# EAGLE board E4m (EAGLE 7.6.0)
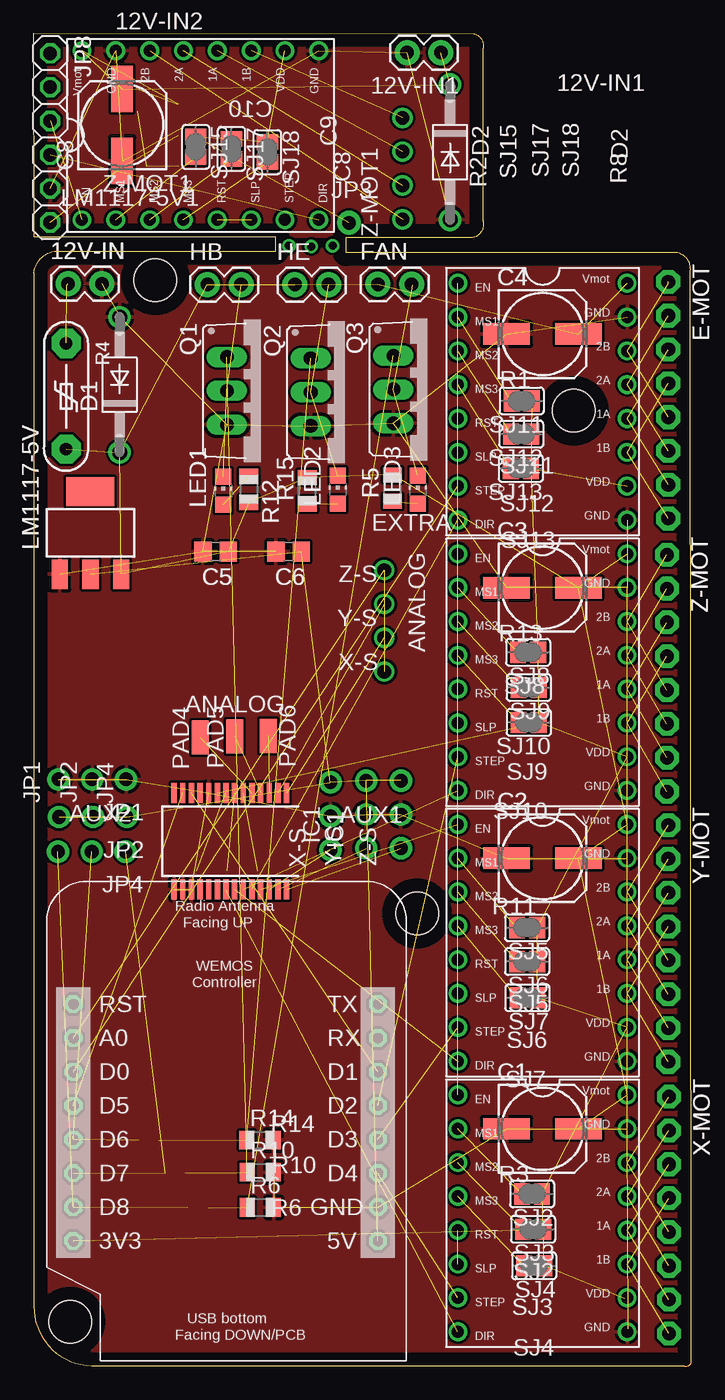
[diagram p0: board, top side]
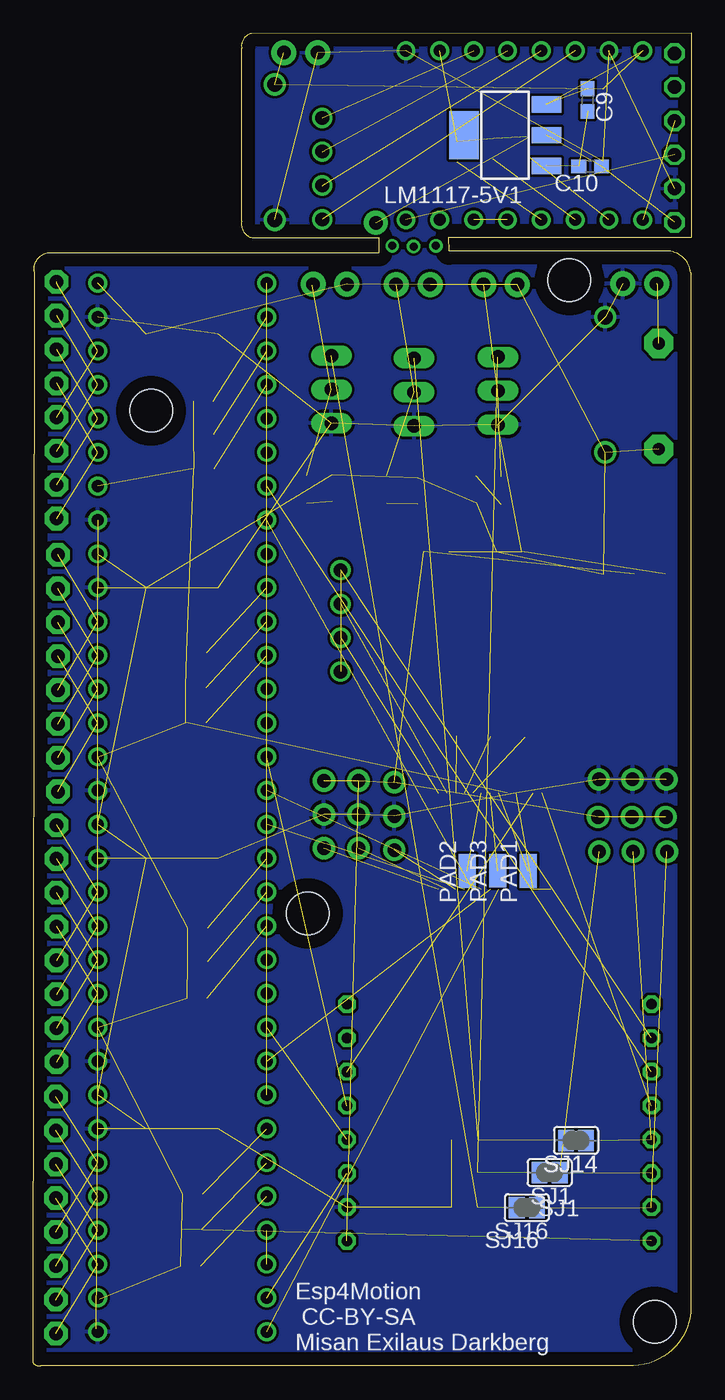
[diagram p1: board, bottom side, seen from below]

Size 49.41 x 100.11 mm. Coordinates in mm from the lower left corner, seen from the top.
Outline: 0,100.11 0.03,84.78 18.22,84.8 18.19,83.74 2.07,83.74 arc90 0.05,82.12 0.05,4.52 arc90 4.37,0.05 48.77,0.05 arc90 49.41,0.26 49.31,82.16 arc90 48.37,83.61 23.47,83.61 23.47,84.75 32.98,84.75 arc90 33.77,85.98 33.77,98.98 arc90 33.05,100.08 0.02,100.1
Copper layers (1*16): Top 0.035mm / dielectric 1.5mm / Bottom 0.035mm
Design rules "default *": minimum track width 10mil, minimum drill 24mil, track to track 8mil, track to pad 8mil, pad to pad 8mil, via to via 8mil, smd to smd 8mil, copper to edge 40mil, drill to drill 8mil, minimum pad ring 10mil, minimum via ring 8mil, stop-mask expansion 4mil, vias tented up to drill 0mil, thermal gap 10mil
Net classes: 1 Power: width 0.8 mm; 2 line: width 0.4 mm; 3 aux: width 0.2 mm
Holes 3.2 mm at 2.77,3.35 9.17,81.55 28.82,34 40.57,71.75

## Footprints (pad centres in the part's own frame; a part is rotated, then mirrored left to right if it is on the bottom)
1X02 = drill 1.016 pad 1.88: 1 0,0; 2 2.54,0
1X04 = drill 1.016: 1 -2.54,0; 2 0,0; 3 2.54,0; 4 5.08,0
153CLV-0605 = smd 3.5 x 1.6: + 2.7,0; - -2.7,0
C0805 = smd 1.3 x 1.5: 1 -0.95,0; 2 0.95,0
C0603 = smd 1.1 x 1: 1 -0.85,0; 2 0.85,0
DO41-10 = drill 1.118: A 5.08,0; C -5.08,0
1X08-CLEANBIG = drill 1.016 pad 1.778 octagon: 1 -8.89,0; 2 -6.35,0; 3 -3.81,0; 4 -1.27,0; 5 1.27,0; 6 3.81,0; 7 6.35,0; 8 8.89,0
SSOP28 = smd 0.4 x 1.5: 1 -4.225,-3.625; 2 -3.575,-3.625; 3 -2.925,-3.625; 4 -2.275,-3.625; 5 -1.625,-3.625; 6 -0.975,-3.625; 7 -0.325,-3.625; 8 0.325,-3.625; 9 0.975,-3.625; 10 1.625,-3.625; 11 2.275,-3.625; 12 2.925,-3.625; 13 3.575,-3.625; 14 4.225,-3.625; 15 4.225,3.625; 16 3.575,3.625; 17 2.925,3.625; 18 2.275,3.625; 19 1.625,3.625; 20 0.975,3.625; 21 0.325,3.625; 22 -0.325,3.625; 23 -0.975,3.625; 24 -1.625,3.625; 25 -2.275,3.625; 26 -2.925,3.625; 27 -3.575,3.625; 28 -4.225,3.625
1X03-CLEANBIG = drill 1.016 pad 1.676: 1 -2.54,0; 2 0,0; 3 2.54,0
1X01-CLEANBIG = drill 1.016 pad 1.778: 1 0,0
1X06 = drill 1.016 octagon: 1 -6.35,0; 2 -3.81,0; 3 -1.27,0; 4 1.27,0; 5 3.81,0; 6 6.35,0
CHIP-LED0805 = smd 1.2 x 1.2: A 0,-1.05; C 0,1.05
SOT223 = smd 1.219 x 2.235: 1 -2.311,-3.099; 2 0,-3.099; 3 2.311,-3.099 | smd 3.6 x 2.2: TAB 0,3.099
SMD1,27-2,54 = smd 1.27 x 2.54: 1 0,0
TO220BV = drill 1.016 long: D 0,-2.54; G -2.54,-2.54; S 2.54,-2.54
PF-8.0 = drill 0.914 pad 2.184 octagon: 1 -3.969,0; 2 3.969,0
R0805 = smd 1.1 x 1.4: 1 -1,0; 2 1,0
SJ = smd 1.168 x 1.6: 1 -0.762,0; 2 0.762,0
A4988BREAKOUT = drill 0.9: 1A 8.89,1.27; 1B 11.43,1.27; 2A 6.35,1.27; 2B 3.81,1.27; DIR 16.51,-11.43; EN -1.27,-11.43; GND 16.51,1.27; GND@0 1.27,1.27; MS1 1.27,-11.43; MS2 3.81,-11.43; MS3 6.35,-11.43; RST 8.89,-11.43; SLP 11.43,-11.43; STEP 13.97,-11.43; VDD 13.97,1.27; VMOT -1.27,1.27
WEMOS = drill 0.8 octagon: 3V3 0,0; 5V 22.86,0; A0 0,15.24; D0 0,12.7; D1 22.86,12.7; D2 22.86,10.16; D3 22.86,7.62; D4 22.86,5.08; D5 0,10.16; D6 0,7.62; D7 0,5.08; D8 0,2.54; GND 22.86,2.54; RST 0,17.78; RX 22.86,15.24; TX 22.86,17.78

## Placement (x,y rotation side)
12V-IN  [1X02]  2.61,81.29 0 top
12V-IN1  [1X02]  30.6,98.65 180 top
ANALOG  [1X04]  26.35,57.25 270 top
C1  100uf  [153CLV-0605]  38.23,17.83 0 top
C2  100uf  [153CLV-0605]  38.23,38.15 0 top
C3  100uf  [153CLV-0605]  38.23,58.47 0 top
C4  100uf  [153CLV-0605]  38.23,77.52 0 top
C5  10uf  [C0805]  13.69,61.18 180 top
C6  100uf  [C0805]  19.17,61.18 180 top
C8  100uf  [153CLV-0605]  6.67,93.21 90 top
C9  10uf  [C0603]  7.8,95.09 270 bottom
C10  100uf  [C0603]  7.62,90.11 180 bottom
D1  1N4004  [DO41-10]  6.48,73.71 90 top
D2  1N4004  [DO41-10]  31.29,91.18 270 top
E-MOT  [1X08-CLEANBIG]  47.67,72.55 270 top
FAN  [1X02]  25.87,81.25 0 top
HB  [1X02]  13.07,81.23 0 top
HE  [1X02]  19.63,81.23 0 top
IC1  MCP23017SS  [SSOP28]  14.79,39.43 180 top
JP1  [1X03-CLEANBIG]  4.42,44.07 180 top
JP2  [1X03-CLEANBIG]  4.47,41.25 180 top
JP3  [1X01-CLEANBIG]  23.7,85.88 0 top
JP4  [1X03-CLEANBIG]  4.39,38.65 180 top
JP8  [1X06]  1.27,92.25 270 top
LED1  [CHIP-LED0805]  14.27,65.75 0 top
LED2  [CHIP-LED0805]  22.87,65.85 0 top
LED3  [CHIP-LED0805]  28.87,65.85 0 top
LM1117-5V  LM1117IMPX-ADJ  [SOT223]  4.29,62.58 0 top
LM1117-5V1  LM1117IMPX-ADJ  [SOT223]  13.99,92.45 90 bottom
PAD1  WIREPADSMD1,27-254  [SMD1,27-2,54]  12.27,37.19 0 bottom
PAD2  WIREPADSMD1,27-254  [SMD1,27-2,54]  16.84,37.19 0 bottom
PAD3  WIREPADSMD1,27-254  [SMD1,27-2,54]  14.55,37.21 0 bottom
PAD4  WIREPADSMD1,27-254  [SMD1,27-2,54]  12.52,47.22 0 top
PAD5  WIREPADSMD1,27-254  [SMD1,27-2,54]  15.11,47.3 0 top
PAD6  WIREPADSMD1,27-254  [SMD1,27-2,54]  17.65,47.32 180 top
Q1  IRL540  [TO220BV]  17.07,73.25 270 top
Q2  IRL540  [TO220BV]  23.37,73.15 270 top
Q3  IRL540  [TO220BV]  29.57,73.35 270 top
R4  11  [PF-8.0]  2.46,72.85 270 top
R5  22R  [R0805]  26.97,65.95 90 top
R6  10k  [R0805]  17.05,11.93 0 top
R10  10k  [R0805]  17.04,14.57 0 top
R12  22R  [R0805]  16.17,65.85 270 top
R14  10k  [R0805]  17.02,16.98 0 top
R15  22R  [R0805]  20.57,65.75 90 top
SJ1  [SJ]  10.65,14.54 180 bottom
SJ2  [SJ]  37.44,12.94 180 top
SJ3  [SJ]  37.52,10.29 180 top
SJ4  [SJ]  37.6,7.54 180 top
SJ5  [SJ]  37.07,32.93 180 top
SJ6  [SJ]  37.07,30.39 180 top
SJ7  [SJ]  37.1,27.66 180 top
SJ8  [SJ]  37.15,53.62 180 top
SJ9  [SJ]  37.2,50.97 180 top
SJ10  [SJ]  37.2,48.35 180 top
SJ11  [SJ]  36.66,72.49 180 top
SJ12  [SJ]  36.63,70 180 top
SJ13  [SJ]  36.6,67.43 180 top
SJ14  [SJ]  8.67,16.95 180 bottom
SJ15  [SJ]  12.2,91.58 270 top
SJ16  [SJ]  12.36,11.91 180 bottom
SJ17  [SJ]  14.87,91.42 270 top
SJ18  [SJ]  17.58,91.19 270 top
U$1  A4988BREAKOUT  [A4988BREAKOUT]  43.31,19.1 270 top
U$2  A4988BREAKOUT  [A4988BREAKOUT]  43.31,80.06 270 top
U$3  A4988BREAKOUT  [A4988BREAKOUT]  43.31,39.42 270 top
U$5  WEMOS  [WEMOS]  3.01,9.41 0 top
U$6  A4988BREAKOUT  [A4988BREAKOUT]  4.92,97.52 0 top
U$9  A4988BREAKOUT  [A4988BREAKOUT]  43.31,59.74 270 top
X-MOT  [1X08-CLEANBIG]  47.72,11.35 270 top
X-S  [1X03-CLEANBIG]  22.31,41.31 90 top
Y-MOT  [1X08-CLEANBIG]  47.67,31.75 270 top
Y-S  [1X03-CLEANBIG]  24.99,41.44 90 top
Z-MOT  [1X08-CLEANBIG]  47.57,52.05 270 top
Z-MOT1  [1X04]  27.72,88.67 90 top
Z-S  [1X03-CLEANBIG]  27.6,41.44 90 top

## Library data of the parts
12V-IN 12V-IN1 FAN HB HE = SparkFun
ANALOG LED1-LED3 U$1-U$3 U$6 U$9 Z-MOT1 = RepRapjr
C1-C4 C8 = resistor
C5 C6 C9 C10 = eagle-ltspice; SPICEMODEL: NONE; SPICEPREFIX: C
D1 D2 = diode
E-MOT IC1 JP1-JP4 JP8 R5 R6 R10 R12 R14 R15 X-MOT X-S Y-MOT Y-S Z-MOT Z-S = adafruit
LM1117-5V LM1117-5V1 = lm1117
PAD1-PAD6 = wirepad
Q1-Q3 = smootietransistor-power
R4 = polyswitch
SJ1-SJ18 = jumper
U$5 = 1455413453956-wemos

## Nets
3V3: IC1.9 SJ2.1 SJ3.1 SJ4.1 SJ5.1 SJ6.1 SJ7.1 SJ8.1 SJ9.1 SJ10.1 SJ11.1 SJ12.1 SJ13.1 U$1.VDD U$2.VDD U$3.VDD U$5.3V3 U$9.VDD
3V31: JP3.1 SJ15.1 SJ17.1 SJ18.1 U$6.VDD
5V: C6.1 JP2.1 JP2.2 JP2.3 LM1117-5V.2 U$5.5V X-S.3 Y-S.3 Z-S.3
5V1: C10.1 JP8.6 LM1117-5V1.2
12V [Power]: C1.+ C2.+ C3.+ C4.+ C5.1 D1.C FAN.1 HB.1 HE.1 LM1117-5V.3 R4.2 R5.2 R12.2 R15.2 U$1.VMOT U$2.VMOT U$3.VMOT U$9.VMOT
12V1 [Power]: 12V-IN1.1 C8.+ C9.1 D2.C LM1117-5V1.3 U$6.VMOT
ANALOG: ANALOG.1 ANALOG.4 U$5.A0
AUX2 [aux]: IC1.8 PAD1.1
E-DIR: IC1.24 U$2.DIR
E-STEP: U$2.STEP U$5.D0
ENABLE: IC1.25 U$1.EN U$2.EN U$3.EN U$9.EN
ENABLE1: JP8.3 U$6.EN
FAN: JP4.3 SJ16.1 U$5.D8
GND: 12V-IN.2 C1.- C2.- C3.- C4.- C5.2 C6.2 D1.A IC1.10 IC1.15 IC1.16 IC1.17 JP1.1 JP1.2 JP1.3 LM1117-5V.1 Q1.S Q2.S Q3.S R6.2 R10.2 R14.2 U$1.GND U$1.GND@0 U$2.GND U$2.GND@0 U$3.GND U$3.GND@0 U$5.GND U$9.GND U$9.GND@0 X-S.2 Y-S.2 Z-S.2
GND1: 12V-IN1.2 C8.- D2.A JP8.5 U$6.GND U$6.GND@0
HB0: JP4.1 SJ1.1 U$5.D7
HE0: JP4.2 SJ14.1 U$5.D6
N$1: LED3.A R5.1
N$3 [aux]: IC1.7 PAD3.1
N$4: SJ12.2 U$2.MS2
N$5: U$2.RST U$2.SLP
N$6: SJ13.2 U$2.MS3
N$7: SJ11.2 U$2.MS1
N$8 [line]: U$3.1B Y-MOT.4 Y-MOT.8
N$9 [line]: U$3.1A Y-MOT.3 Y-MOT.7
N$10: U$3.2A Y-MOT.2 Y-MOT.6
N$11 [line]: U$3.2B Y-MOT.1 Y-MOT.5
N$12 [line]: U$1.1B X-MOT.4 X-MOT.8
N$13 [Power]: HB.2 LED1.C Q1.D
N$14 [line]: U$1.1A X-MOT.3 X-MOT.7
N$15: U$1.2A X-MOT.2 X-MOT.6
N$16 [line]: U$1.2B X-MOT.1 X-MOT.5
N$17 [line]: U$9.1B Z-MOT.4 Z-MOT.8
N$18: FAN.2 LED3.C Q3.D
N$19 [aux]: IC1.3 PAD6.1
N$20 [line]: U$9.1A Z-MOT.3 Z-MOT.7
N$21 [aux]: IC1.6 PAD2.1
N$22 [aux]: IC1.5 PAD4.1
N$23: Q2.G R14.1 SJ14.2
N$24: SJ3.2 U$1.MS2
N$25: U$9.RST U$9.SLP
N$26 [aux]: IC1.4 PAD5.1
N$27: Q3.G R6.1 SJ16.2
N$28: U$3.RST U$3.SLP
N$29: U$1.RST U$1.SLP
N$30 [Power]: 12V-IN.1 R4.1
N$34: SJ4.2 U$1.MS3
N$35: SJ2.2 U$1.MS1
N$37: SJ17.2 U$6.MS2
N$39: SJ18.2 U$6.MS3
N$40: SJ15.2 U$6.MS1
N$41 [line]: U$6.2B Z-MOT1.1
N$42 [line]: U$6.2A Z-MOT1.2
N$43 [line]: U$6.1A Z-MOT1.3
N$44 [line]: U$6.1B Z-MOT1.4
N$45: U$6.RST U$6.SLP
N$46: U$9.2A Z-MOT.2 Z-MOT.6
N$48 [line]: U$9.2B Z-MOT.1 Z-MOT.5
N$49: C9.2 C10.2 LM1117-5V1.1
N$50 [line]: E-MOT.4 E-MOT.8 U$2.1B
N$51 [line]: E-MOT.3 E-MOT.7 U$2.1A
N$54: LED1.A R12.1
N$55: E-MOT.2 E-MOT.6 U$2.2A
N$56: SJ6.2 U$3.MS2
N$57 [Power]: HE.2 LED2.C Q2.D
N$58: SJ7.2 U$3.MS3
N$59: SJ5.2 U$3.MS1
N$60 [line]: E-MOT.1 E-MOT.5 U$2.2B
N$64: SJ9.2 U$9.MS2
N$65: LED2.A R15.1
N$66: SJ10.2 U$9.MS3
N$67: SJ8.2 U$9.MS1
N$S4: Q1.G R10.1 SJ1.2
S-A0: ANALOG.3 IC1.1
S-A1: ANALOG.2 IC1.2
SCL: IC1.12 U$5.D1
SDA: IC1.13 U$5.D5
X-DIR: IC1.21 U$1.DIR
X-STEP: U$1.STEP U$5.D4
X-STOP: IC1.26 X-S.1
Y-DIR: IC1.22 U$3.DIR
Y-STEP: U$3.STEP U$5.D3
Y-STOP: IC1.27 Y-S.1
Z-DIR: IC1.23 U$9.DIR
Z-DIR1: JP8.4 U$6.DIR
Z-STEP: U$5.D2 U$9.STEP
Z-STEP1: U$6.STEP
Z-STOP: IC1.28 Z-S.1

## Tracks (layer width: path | path; a pad name or v marks a point on that pad's centre or on a via)
3V3  (17 unrouted)
  Top 0.254: 44.42,5.05 U$1.VDD
3V31  (4 unrouted)
5V  (8 unrouted)
5V1  (2 unrouted)
12V  (17 unrouted)
12V1  (5 unrouted)
ANALOG  (2 unrouted)
AUX2  (1 unrouted)
E-DIR  (1 unrouted)
E-STEP  (1 unrouted)
ENABLE  (4 unrouted)
ENABLE1  (1 unrouted)
FAN  (2 unrouted)
GND  (33 unrouted)
  Top 0.254: 44.67,2.8 U$1.GND
  pour Top: -0.9,84.02 51.07,84.45 51.07,-5.15 -1.23,-5.15
  pour Bottom: 54.57,84.22 54.57,-8.65 -2.03,-8.65 -2.03,84.22
GND1  (5 unrouted)
  pour Top: -0.43,101.25 50.07,101.25 49.99,84.85 -0.43,84.85
  pour Bottom: -0.73,84.55 50.07,84.55 50.07,101.75 -0.73,101.75
HB0  (2 unrouted)
HE0  (2 unrouted)
N$1  (1 unrouted)
N$3  (1 unrouted)
N$4  (1 unrouted)
N$5  (1 unrouted)
N$6  (1 unrouted)
N$7  (1 unrouted)
N$8  (2 unrouted)
N$9  (2 unrouted)
N$10  (2 unrouted)
N$11  (2 unrouted)
N$12  (2 unrouted)
N$13  (2 unrouted)
N$14  (2 unrouted)
N$15  (2 unrouted)
N$16  (2 unrouted)
N$17  (2 unrouted)
N$18  (2 unrouted)
  Bottom 0.254: 28.47,81.2 FAN.2
N$19  (1 unrouted)
N$20  (2 unrouted)
N$21  (1 unrouted)
N$22  (1 unrouted)
N$23  (2 unrouted)
N$24  (1 unrouted)
N$25  (1 unrouted)
N$26  (1 unrouted)
N$27  (2 unrouted)
N$28  (1 unrouted)
N$29  (1 unrouted)
N$30  (2 unrouted)
N$31  (via drill 0.6)
  other vias: 19.2,84.14
N$32  (via drill 0.6)
  other vias: 20.87,84.09
N$33  (via drill 0.6)
  other vias: 22.47,84.14
N$34  (1 unrouted)
N$35  (1 unrouted)
N$37  (1 unrouted)
N$39  (1 unrouted)
N$40  (1 unrouted)
N$41  (1 unrouted)
N$42  (1 unrouted)
N$43  (1 unrouted)
N$44  (1 unrouted)
N$45  (1 unrouted)
N$46  (2 unrouted)
N$48  (2 unrouted)
N$49  (2 unrouted)
N$50  (2 unrouted)
N$51  (2 unrouted)
N$54  (1 unrouted)
N$55  (2 unrouted)
N$56  (1 unrouted)
N$57  (2 unrouted)
N$58  (1 unrouted)
N$59  (1 unrouted)
N$60  (3 unrouted)
N$64  (1 unrouted)
N$65  (1 unrouted)
N$66  (1 unrouted)
N$67  (1 unrouted)
N$S4  (2 unrouted)
S-A0  (1 unrouted)
S-A1  (1 unrouted)
SCL  (1 unrouted)
SDA  (1 unrouted)
X-DIR  (1 unrouted)
X-STEP  (1 unrouted)
X-STOP  (1 unrouted)
Y-DIR  (1 unrouted)
Y-STEP  (1 unrouted)
Y-STOP  (1 unrouted)
Z-DIR  (1 unrouted)
Z-DIR1  (1 unrouted)
Z-STEP  (1 unrouted)
Z-STOP  (1 unrouted)

## Text on the board
bPlace: Esp4Motion / CC-BY-SA / Misan Exilaus Darkberg
_tNames: JP8 | 12V-IN2 | 12V-IN1 | C10 | C9 | SJ15 | SJ17 | SJ18 | D2 | R2 | C8 | R8 | Z-MOT1 | LM1117-5V1 | 12V-IN | HB | HE | FAN | E-MOT | C4 | Q1 | Q2 | Q3 | R4 | R1 | D1 | SJ11 | R12 | R15 | LED2 | R5 | LED3 | SJ12 | LED1 | EXTRA | SJ13 | C3 | Z-MOT | LM1117-5V | C5 | C6 | Z-S | Y-S | R13 | X-S | SJ8 | ANALOG | SJ9 | JP1 | JP2 | JP4 | IC1 | C2 | SJ10 | Y-MOT | AUX2 | AUX1 | R11 | SJ5 | SJ6 | SJ7 | X-MOT | C1 | R14 | R10 | R3 | R6 | SJ2 | SJ3 | SJ4
_bNames: SJ14 | SJ1 | SJ16